# Altium PCB LB - PCB Route Apenas com o posicionamento.PcbDoc
Units mm, origin at the board's own origin, x right, y up, seen from the top; angles counter-clockwise.
Board outline 38.5 x 63 mm, 2 copper layers (Top Layer, Bottom Layer); 60 components, 39 nets, 188 pads, 0 vias.
Unrouted connection lines stored in the file: 137.
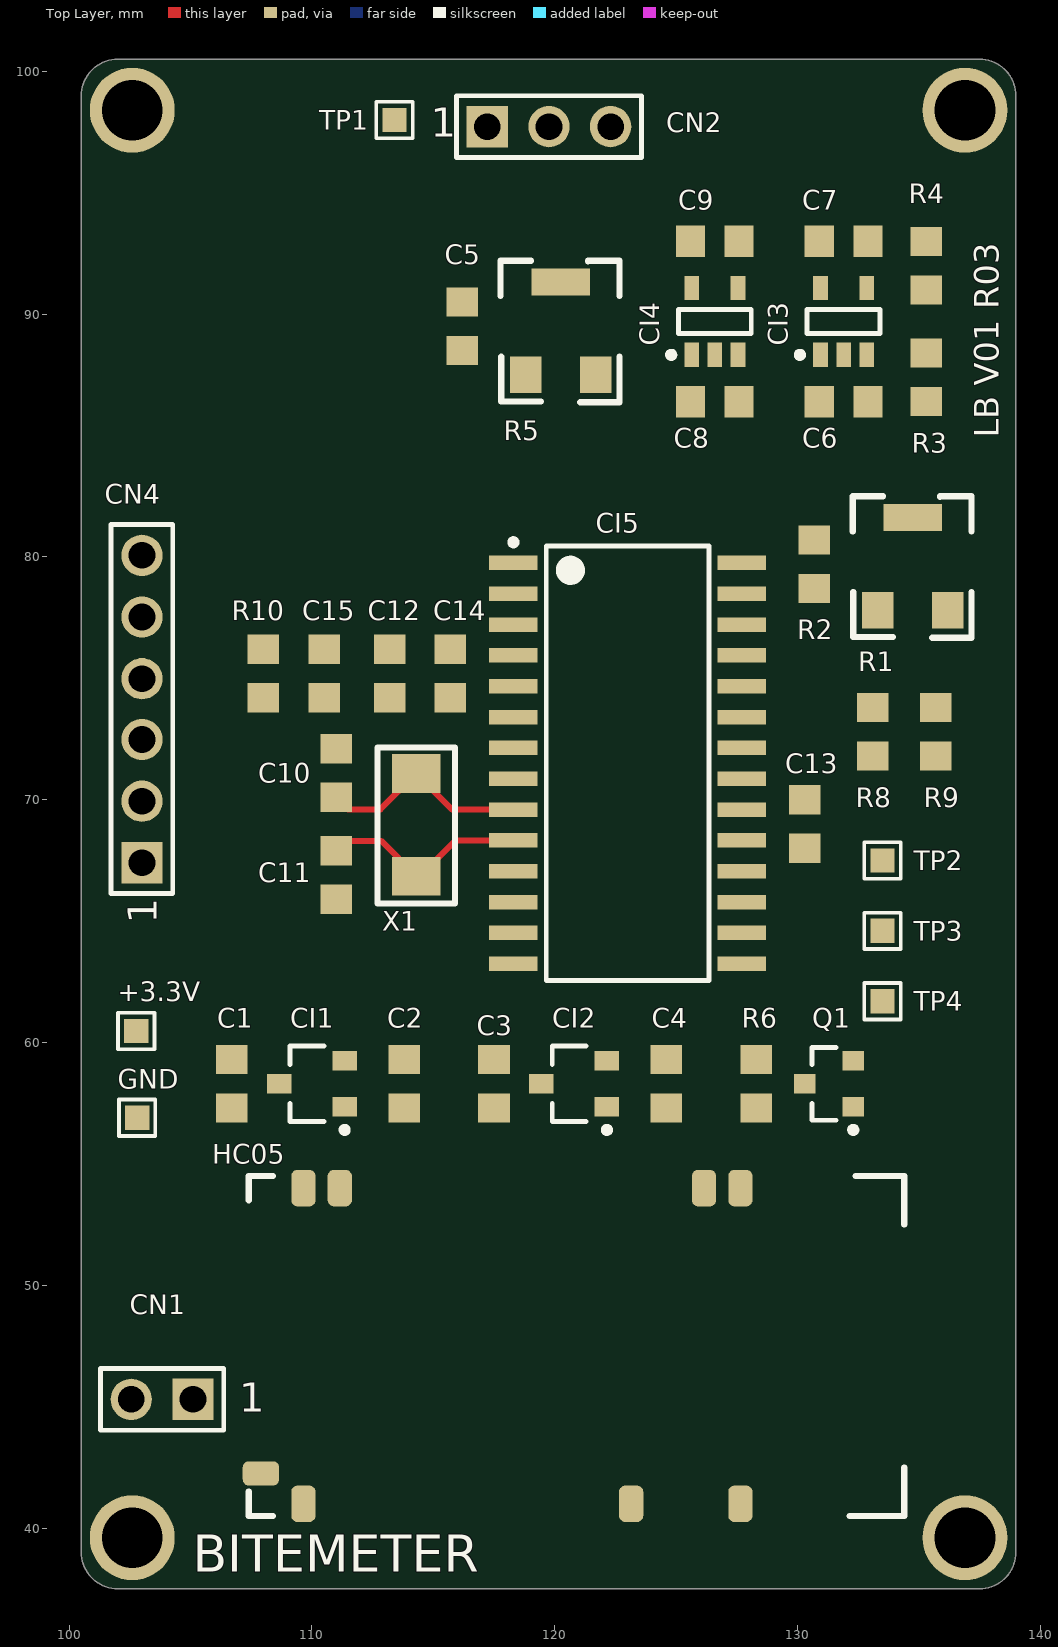
[diagram p0: Top Layer view]
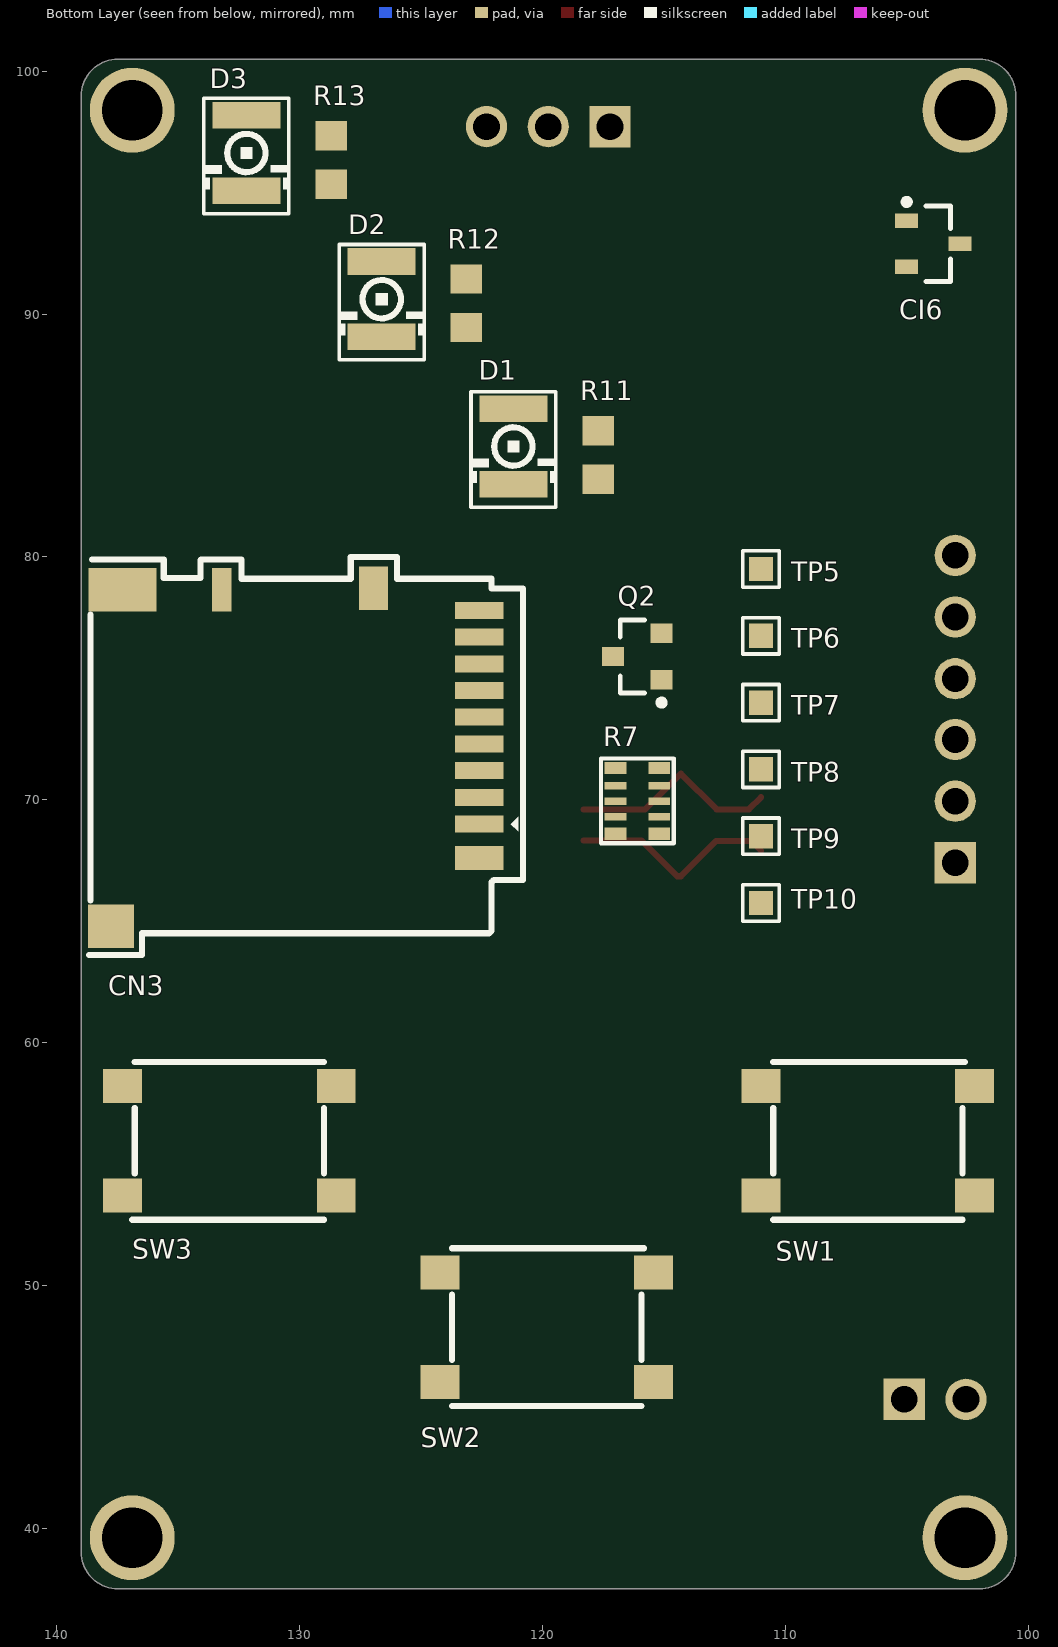
[diagram p1: Bottom Layer view, seen from below]

## Layer stack, top to bottom
Top Solder: solder mask 0.0102, Solder Resist, Dk 3.5
Top Layer: signal copper 0.0356
Dielectric1: dielectric 0.32, FR-4, Dk 4.8
Bottom Layer: signal copper 0.0356
Bottom Solder: solder mask 0.0102, Solder Resist, Dk 3.5

## Board outline
139,99 ccw(c137.5,99) 137.5,100.5 102,100.5 ccw(c102,99) 100.5,99 100.5,39 ccw(c102,39) 102,37.5 137.5,37.5 ccw(c137.5,39) 139,39 139,99

## Design rules (kind name [scope] priority, off if disabled: settings)
Clearance [All] p1: gap=0.254
PolygonConnect [All] p1: connectstyle=Relief reliefconductorwidth=0.254 reliefentries=4 polygonreliefangle="90 Angle" airgapwidth=0.254
RoutingVias [All] p1: holewidth=0.3 width=0.8 viastyle="Through Hole" minholewidth=0.3 minwidth=0.8 maxholewidth=0.3 maxwidth=0.8
SolderMaskExpansion [All] p1: expansion=0.102
UnpouredPolygon [All] p1: allowunpoured=FALSE
Width [All] p1: maxlimit=0.254 minlimit=0.254 preferedwidth=0.254
29 further rules are at their usual default settings.

## Classes and differential pairs
component class "LB - Supply": +3.3V C1 C2 C3 C4 C5 C6 C7 C8 C9 CI1 CI2 CI3 CI4 CN1 CN2 GND R1 R2 R3 R4 R5 TP1
component class "LB - MainBoard": C10 C11 C12 C13 C14 C15 CI5 CI6 CN3 CN4 D1 D2 D3 HC05 Q1 Q2 R6 R7 R8 R9 R10 R11 R12 R13 SW1 SW2 SW3 TP2 TP3 TP4 TP5 TP6 TP7 TP8 TP9 TP10 X1

## Components (designator, comment, footprint, x,y, rotation, side; value= is the part's Value field where it differs from the comment)
+3.3V "TP" TPSMD 102.765,60.469 r90 top
C1 "1uF" R0805 106.7,58.3 r90 top
C2 "1uF" R0805 113.8,58.3 r90 top
C3 "4.7uF" R0805 117.5,58.3 r270 top
C4 "1uF" R0805 124.6,58.3 r90 top
C5 "0.1uF" R0805 116.2,89.5 r270 top
C6 "1uF" R0805 131.9,86.4 r0 top
C7 "4.7uF" R0805 131.9,93 r180 top
C8 "47pF" R0805 126.6,86.4 r180 top
C9 "0.1uF" R0805 126.6,93 r180 top
C10 "22pF" R0805 111,71.1 r90 top (schematic designator C5)
C11 "22pF" R0805 111,66.9 r270 top (schematic designator C6)
C12 "10uF" R0805 113.2,75.2 r270 top (schematic designator C7)
C13 "0.1uF" R0805 130.3,69 r90 top
C14 "0.1uF" R0805 115.7,75.2 r270 top
C15 "0.1uF" R0805 110.5,75.2 r90 top (schematic designator C10)
CI1 "MCP1754S" "SOT23-A MCP1754" 110,58.3 r180 top
CI2 "MCP1754S" "SOT23-A MCP1754" 120.8,58.3 r180 top
CI3 "LP2983AIM5-1.0" "SOT23-5 Amp Op" 131.9,89.7 r90 top
CI4 "MCP6441" "SOT23-5 Amp Op" 126.6,89.7 r90 top
CI5 "PIC18F27J13" PIC24F16KL402 123,71.5 r0 top (schematic designator CI3)
CI6 "MCP9700A" MCP9700A 103.9,92.9 r180 bottom (schematic designator CI4)
CN1 "Header 2" HDR1X2 105.1,45.3 r180 top
CN2 "Header 3" HDR1X3 117.225,97.725 r0 top
CN3 "DM3AT-SF-PEJM5" DM3AT 122.5,69 r270 bottom
CN4 "Header 6" HDR1X6 103,67.4 r90 top
D1 "Red" LTST-C930 121.2,84.55 r180 bottom
D2 "Yellow" LTST-C930 126.624,90.617 r180 bottom
D3 "Blue" LTST-C930 132.199,96.639 r180 bottom
GND "TP" TPSMD 102.8,56.9 r90 top
HC05 "JY-MCU HC-05" "JY-MCU HC-05" 107.9,54 r270 top
Q1 "DMP2305U-7" DMP2305U-7 131.3,58.3 r180 top
Q2 "DMP2305U-7" DMP2305U-7 116.1,75.9 r0 bottom
R1 "200k" 3364X-1-503E 133.3,77.8 r0 top
R2 "470" R0805 130.7,79.7 r90 top
R3 "17.4k" R0805 135.3,87.4 r270 top
R4 "10.0k" R0805 135.3,92 r270 top
R5 "200k" 3364X-1-503E 118.8,87.5 r0 top (schematic designator R3)
R6 "10k" R0805 128.3,58.3 r90 top (schematic designator R1)
R7 "4k7x8 Bus" "MMR15 Mod" 117,68.6 r90 bottom (schematic designator R2)
R8 "17.4k" R0805 133.1,72.8 r90 top (schematic designator R4)
R9 "10.0k" R0805 135.7,72.8 r270 top (schematic designator R5)
R10 "10k" R0805 108,75.2 r270 top
R11 "470" R0805 117.7,84.2 r270 bottom (schematic designator R7)
R12 "470" R0805 123.15,90.45 r90 bottom (schematic designator R8)
R13 "470" R0805 128.7,96.35 r270 bottom (schematic designator R9)
SW1 "" "Push Button2" 102.2,53.7 r0 bottom
SW2 "" "Push Button2" 115.425,46.025 r0 bottom
SW3 "" "Push Button2" 137.3,58.2 r180 bottom
TP1 "TP" TPSMD 113.4,98 r90 top
TP2 "TP" TPSMD 133.5,67.5 r0 top
TP3 "TP" TPSMD 133.5,64.6 r0 top
TP4 "TP" TPSMD 133.5,61.7 r0 top
TP5 "TP" TPSMD 111,79.5 r270 bottom
TP6 "TP" TPSMD 111,76.75 r270 bottom
TP7 "TP" TPSMD 111,74 r270 bottom
TP8 "TP" TPSMD 111,71.25 r270 bottom
TP9 "TP" TPSMD 111,68.5 r270 bottom
TP10 "TP" TPSMD 111,65.75 r270 bottom
X1 "20.000Hz" ABM3 114.3,70.8 r270 top

## Footprints (in the part's own frame and the unit in brackets; to place one, negate y for a bottom-side part, rotate by r counter-clockwise, add the part's x,y. Pads: shape width x height; smd on the part's side, far side on the other; paste and mask are expansions set on the pad)
3364X-1-503E [mm] "Trimpot 50k"
  rect 1.3x1.5 smd: 1(0,0) 3(2.9,0)
  rect 2.4x1.1 smd: 2(1.45,3.825)
  silkscreen extent -1.02,-1.13 3.87,4.7, body extent -1,-1 4.2,5.2, height 1.5
ABM3 [mm] "Crystal 20.000MHz"
  rect 1.6x2 smd: 1(-0.275,0) 2(3.95,0)
  silkscreen extent -1.35,-1.6 5.08,1.6, body extent -1.05,-1.48 4.75,1.48, height 1.3
DM3AT [mm]
  rect 0.7x2 smd: 1(0,-0.1) 2(-1.1,-0.1) 3(-2.2,-0.1) 4(-3.3,-0.1) 5(-4.4,-0.1) 6(-5.5,-0.1) 7(-6.6,-0.1) 8(-7.7,-0.1) 9(-8.8,-0.1)
  rect 1.8x0.8 smd: 10(-9.65,-10.71)
  rect 1.8x1.2 smd: 11(-9.71,-4.47)
  rect 1.8x2.8 smd: 12(-9.65,-14.8)
  rect 1.8x1.9 smd: 13(4.21,-15.28)
  rect 1x2 smd: 14(1.4,-0.1)
  silkscreen extent -11,-16.18 5.4,1.7, body extent -9.71,-16.19 4.14,-0.04, height 1.68
DMP2305U-7 [mm] "SOT23, 3-Leads, Body 2.90x2.45mm, Pitch 0.95mm, IPC Medium Density"
  rect 0.9x0.8 smd: D(1,0) G(-1,0.95) S(-1,-0.95)
  silkscreen extent -1.13,-1.5 0.7,2.02, body extent -0.7,-1.5 0.7,1.5, height 1.1
HDR1X2 [mm] "Connector; Header; 2 Position"
  rect 1.7x1.7 hole 1.1: 1(0,0)
  round 1.7 hole 1.1: 2(2.54,0)
  silkscreen extent -1.27,-1.27 3.81,1.27, body extent -1.27,-3.17 3.81,2.67, height 10.02
HDR1X3 [mm] "Connector; Header; 3 Position"
  rect 1.7x1.7 hole 1.1: 1(0,0)
  round 1.7 hole 1.1: 2(2.54,0) 3(5.08,0)
  silkscreen extent -1.27,-1.27 6.35,1.27, body extent -1.27,-0.34 6.35,10.71, height 5.87
HDR1X6 [mm] "Connector; Header; 6 Position"
  rect 1.7x1.7 hole 1.1: 1(0,0)
  round 1.7 hole 1.1: 2(2.54,0) 3(5.08,0) 4(7.585,0) 5(10.125,0) 6(12.665,0)
  silkscreen extent -1.27,-1.27 13.94,1.27, body extent -1.26,-1.78 13.98,1.78, height 8.64
"JY-MCU HC-05" [mm] "Modulo Bluetooth HC-0x"
  rrect50% 1.5x1 smd: 1(0,19.75) 2(0,18.25) 12(0,3.25) 13(0,1.75) 22(13,1.75) 31(13,15.25) 34(13,19.75)
  rrect50% 1x1.5 smd: 21(11.75,0)
  silkscreen extent -0.5,-0.5 13.5,26.5, body extent 0,0 13,26, height 2
LTST-C930 [mm] "LED LITE-ON LTST-C930"
  rect 2.8x1.1 smd: A(0,1.55) K(0,-1.55)
  silkscreen extent -1.75,-2.5 1.75,2.25, body extent -1.23,-1.54 1.23,1.54, height 2.4
MCP9700A [mm] "Sensor de temperatura"
  rect 0.95x0.6 smd: 1(-1.1,0.95) 2(-1.1,-0.95) 3(1.1,0)
  silkscreen extent -1.23,-1.55 0.7,1.85, body extent -0.7,-1.52 0.7,1.53, height 1.12
"MMR15 Mod" [mm]
  rect 0.5x0.9 smd: 1(0,-1.81) 5(2.705,-1.81) 6(2.705,0) 10(0,0)
  rect 0.32x0.9 smd: 2(0.7,-1.81) 3(1.34,-1.81) 4(1.98,-1.81) 7(1.98,0) 8(1.34,0) 9(0.7,0)
  silkscreen extent -0.39,-2.4 3.1,0.59, body extent 0.03,-1.95 2.73,-0.05, height 0.55
PIC24F16KL402 [mm] "SOIC, 28-Leads, Body 17.90x7.50mm, Pitch 1.27mm, IPC Medium Density"
  rect 2x0.6 smd: 1(-4.7,8.255) 2(-4.7,6.985) 3(-4.7,5.715) 4(-4.7,4.445) 5(-4.7,3.175) 6(-4.7,1.905) 7(-4.7,0.635) 8(-4.7,-0.635) 9(-4.7,-1.905) 10(-4.7,-3.175) 11(-4.7,-4.445) 12(-4.7,-5.715) 13(-4.7,-6.985) 14(-4.7,-8.255) 15(4.7,-8.255) 16(4.7,-6.985) 17(4.7,-5.715) 18(4.7,-4.445) 19(4.7,-3.175) 20(4.7,-1.905) 21(4.7,-0.635) 22(4.7,0.635) 23(4.7,1.905) 24(4.7,3.175) 25(4.7,4.445) 26(4.7,5.715) 27(4.7,6.985) 28(4.7,8.255)
  silkscreen extent -4.82,-8.95 3.35,9.23, body extent -3.75,-8.95 3.75,8.95, height 2.65
"Push Button2" [mm]
  rect 1.6x1.4 smd: 1(0,0) 2(0,-4.5) 3(8.8,0) 4(8.8,-4.5)
  silkscreen extent 0.4,-5.5 8.3,1, body extent -0.6,-5.2 9.4,0.8, height 7.1
R0805 [mm] "Molded Resistor, 2-Leads, Body 2.00x1.25mm, IPC Medium Density"
  rect 1.2x1.3 smd: 1(-1,0) 2(1,0)
  body extent -1.05,-0.63 1.05,0.63, height 0.6
"SOT23-5 Amp Op" [mm] "Amp Op"
  rect 1x0.6 smd: 1(-1.375,0.95) 2(-1.375,0) 3(-1.375,-0.95) 4(1.375,-0.95) 5(1.375,0.95)
  silkscreen extent -1.5,-1.5 0.5,1.92, body extent -0.88,-1.5 0.87,1.5, height 1.45
"SOT23-A MCP1754" [mm] "MCP1754"
  rect 1x0.8 smd: 1(-1.35,0.95) 2(-1.35,-0.95) 3(1.35,0)
  silkscreen extent -1.48,-1.55 0.9,2.02, body extent -0.9,-1.55 0.9,1.55, height 1.1
TPSMD [mm] "Test Point SMD"
  rect 1x1 smd: 1(0,0)
  silkscreen extent -0.75,-0.75 0.75,0.75

## Part data
+3.3V GND TP1 TP2 TP3 TP4 TP5 TP6 TP7 TP8 TP9 TP10: "Test Point"
C1 C3 C7: library part C, "Capictor Cerâmico 4.7uFx16V"
C2 C4 C6: library part C, "Capictor Cerâmico 1uFx16V"
C5 C8 C9 C13 C14 C15: library part C, "Capacitor 0.1uFx25V"
C10 C11: library part C, "Capacitor 22pF"
C12: library part C, "Capacitor 10uFx6.3V"
CI1 CI2: library part "Regulador 3.3V - SOT223-3, 4-Leads, Body 6.50x7.00mm (avg), Pitch 2.30mm, IPC Medium_1", "Regulador 3.3V MCP1754S"
CI3: library part "Regulador 1.0V - SOT23-5", "Regulador 1.0V"
CI4: library part "Amp Op", "Amp Op Rail-to-Rail"
CI5: "PIC18 8Bits"
CI6: "Sensor de temperatura"
CN1: library part "Conector Alimentação", "Header, 2-Pin"
CN2: library part "Conector Sensor", "Header, 3-Pin"
CN3: library part "MicroSD - DM3CS-SF", "Slot Micro SD - Push-Pull"
CN4: library part "Conector Programação", "Header, 6-Pin"
D1 D2 D3: library part LED, "LED"
HC05: "Modulo Bluetooth HC-05"
Q1 Q2: library part "MOSFET-P DIODE", "MOSFET-P"
R1 R5: library part Trimpot, "Trimpot 200k"
R2 R3 R4 R6 R8 R9 R10 R11 R12 R13: library part R
R7: library part "R ARRAY BUS 8 - 10 PIN", "Brigde 4k7x8"
SW1 SW2 SW3: library part "Push button", "Push Button"
X1: library part XTAL, "Crystal 20.000Hz"

## Free pads (board coordinates)
  round 3.5 hole 2.5: 1(102.6,98.4) 2(136.9,98.4) 3(102.6,39.6) 3(136.9,39.6)

## Nets (pads, with @x,y where several pads share a name; then routed paths per layer and width w, separated by ;. In a path a pad name is that pad's centre, name@x,y a point inside that pad or via, vN(x,y) a via of type N, cw(c..) or ccw(c..) an arc to the next point about the centre after c; other vN are vias at no path point)
+3.3VCC: +3.3V.1 C2.2 C9.2 C13.2 C14.2 CI1.2 CI4.5 CI5.5 CI5.20 CI6.1 CN4.2 D1.A D2.A Q2.S R1.1 R6.2 R7.5 R7.10 R10.2
"+3.3VCC BT": C4.2 CI2.2 Q1.S
GND: C1.1 C2.1 C3.1 C4.1 C6.2 C8.1 C9.1 C10.2 C11.2 C12.1 C13.1 C14.1 C15.1 CI1.1 CI2.1 CI3.2 CI4.2 CI5.4 CI5.8 CI5.19 CI6.3 CN1.1 CN2.1 CN3.6 CN3.9 CN3.11 CN3.12 CN3.13 CN3.14 CN4.3 D3.K GND.1 HC05.13 HC05.21 HC05.22 pad.1 pad.2 pad.3 R2.2 R4.1 R9.1 SW1.1 SW2.1 SW3.1
LED_BT: HC05.31 R13.2
LED_POWER: CI5.11 R11.2
LED_STATUS: CI5.12 R12.2
M\C\L\R\: C15.2 CI5.1 CN4.1 R10.1
NetC1_2: C1.2 C3.2 C6.1 CI1.3 CI2.3 CI3.1 CI3.3 CN1.2 R8.2
NetC5_2: C5.2 CI4.4 CN2.3 R5.3
NetC7_1: C7.1 CI3.4
NetC7_2: C7.2 CI3.5 R3.2
NetC10_1: C10.1 CI5.9 X1.1 | length 8.7
  Top Layer w0.254: C10.1 111.5,69.6 112.825,69.6 X1.1 115.78,69.595 CI5.9
NetC11_1: C11.1 CI5.10 X1.2 | length 8.7
  Top Layer w0.254: C11.1 111.4,68.3 112.85,68.3 X1.2 114.45,66.85 115.925,68.325 CI5.10
NetC12_2: C12.2 CI5.6
NetCI5_13: CI5.13 Q2.G R7.1 TP5.1
NetCI5_14: CI5.14 CN3.10 R7.4 TP6.1
NetCI5_15: CI5.15 Q1.G R6.1
NetCI5_16: CI5.16 HC05.34 TP4.1
NetCI5_17: CI5.17 HC05.2 TP2.1
NetCI5_18: CI5.18 HC05.1 TP3.1
NetCI5_21: CI5.21 SW1.2
NetCI5_22: CI5.22 SW2.2
NetCI5_23: CI5.23 CN3.2 R7.9 TP10.1
NetCI5_24: CI5.24 CN3.5 R7.8 TP9.1
NetCI5_25: CI5.25 CN3.3 R7.7 TP8.1
NetCI5_26: CI5.26 CN3.7 R7.6 TP7.1
NetCN3_1: CN3.1 R7.2
NetCN3_4: CN3.4 Q2.D
NetCN3_8: CN3.8 R7.3
NetD1_K: D1.K R11.1
NetD2_K: D2.K R12.1
NetD3_A: D3.A R13.1
NetHC05_12: HC05.12 Q1.D
PGC: CI5.27 CN4.5 SW3.2
PGD: CI5.28 CN4.4
POWER_REF: CI5.7 R8.1 R9.2
SENSOR_MORD: C5.1 C8.2 CI4.1 CI5.2 R5.1 R5.2 TP1.1
SENSOR_TEMP: CI5.3 CI6.2
VREF: CI4.3 R1.2 R1.3 R2.1 R3.1 R4.2
pads on no net: CN2.2 CN4.6 SW1.3 SW1.4 SW2.3 SW2.4 SW3.3 SW3.4

## Silkscreen, mask and mechanical layers (free items; w line width, h text height)
Top Overlay:
  text "LB V01 R03" at 138.3,84.9 h1 r90
  text "BITEMETER" at 105.1,38.2 h1.52
Mecanico:
  lines w0.254: 100.5,38.777 ccw(c101.77,38.777) 101.77,37.507 101.853,37.507 137.486,37.507 cw(c137.486,37.493) 137.5,37.493 137.723,37.493 ccw(c137.723,38.763) 138.993,38.763 138.993,38.853 138.993,99.147 138.993,99.223 ccw(c137.723,99.223) 137.723,100.493 137.647,100.493 101.853,100.493 101.77,100.493 ccw(c101.77,99.223) 100.5,99.223 100.5,99 100.5,39.254 100.5,38.777

## Dimensions
100.5,39 to 119.75,27.75 on Mecanico
100.5,99 to 119.75,108.75 on Mecanico
137.5,100.5 to 137.5,37.493 on Mecanico
100.493,99 to 139,99 on Mecanico

## Text inside footprints (layer, text, board x,y; h text height)
CN1: Top Overlay "1" at 107,44.8 h1.2
CN2: Top Overlay "1" at 114.9,97.3 h1.2
CN4: Top Overlay "1" at 103.6,64.9 h1.2 r90